# EAGLE board ESP Thermometer (EAGLE 9.6.2)
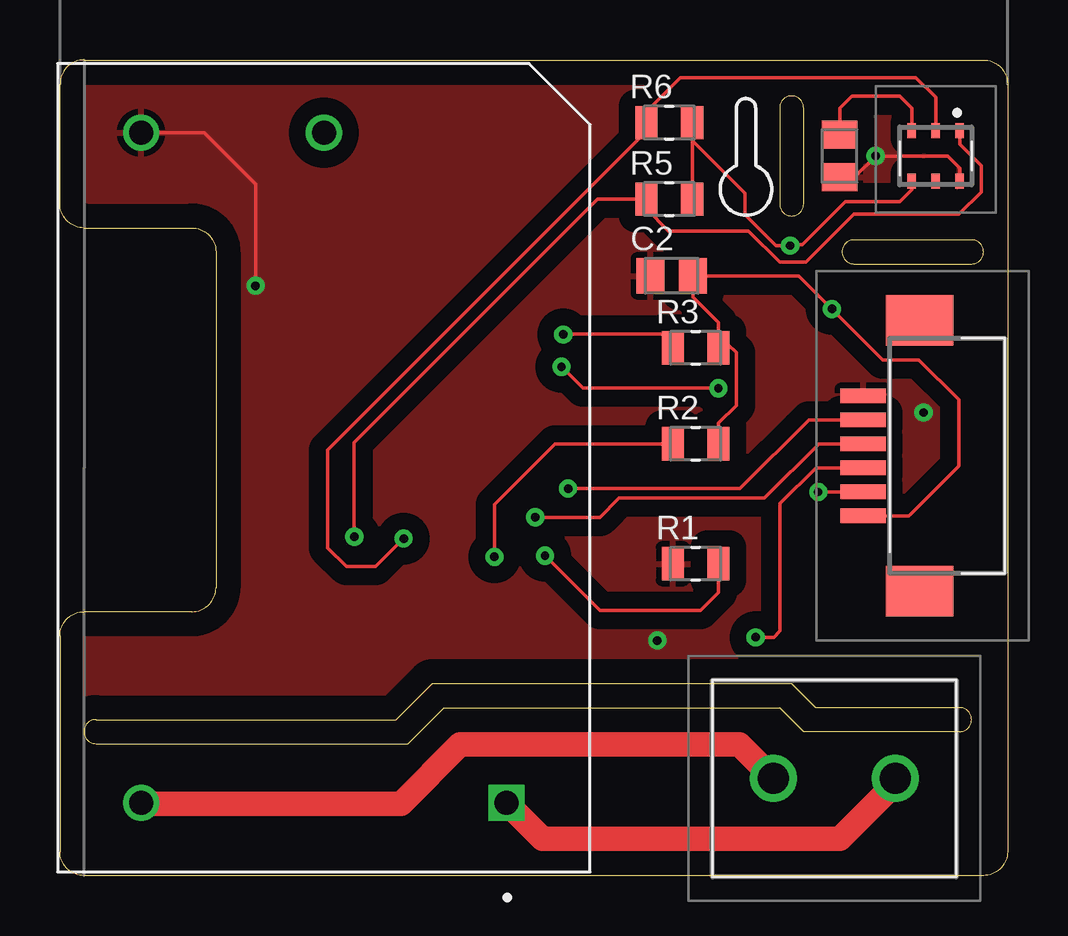
[diagram p0: board, top side]
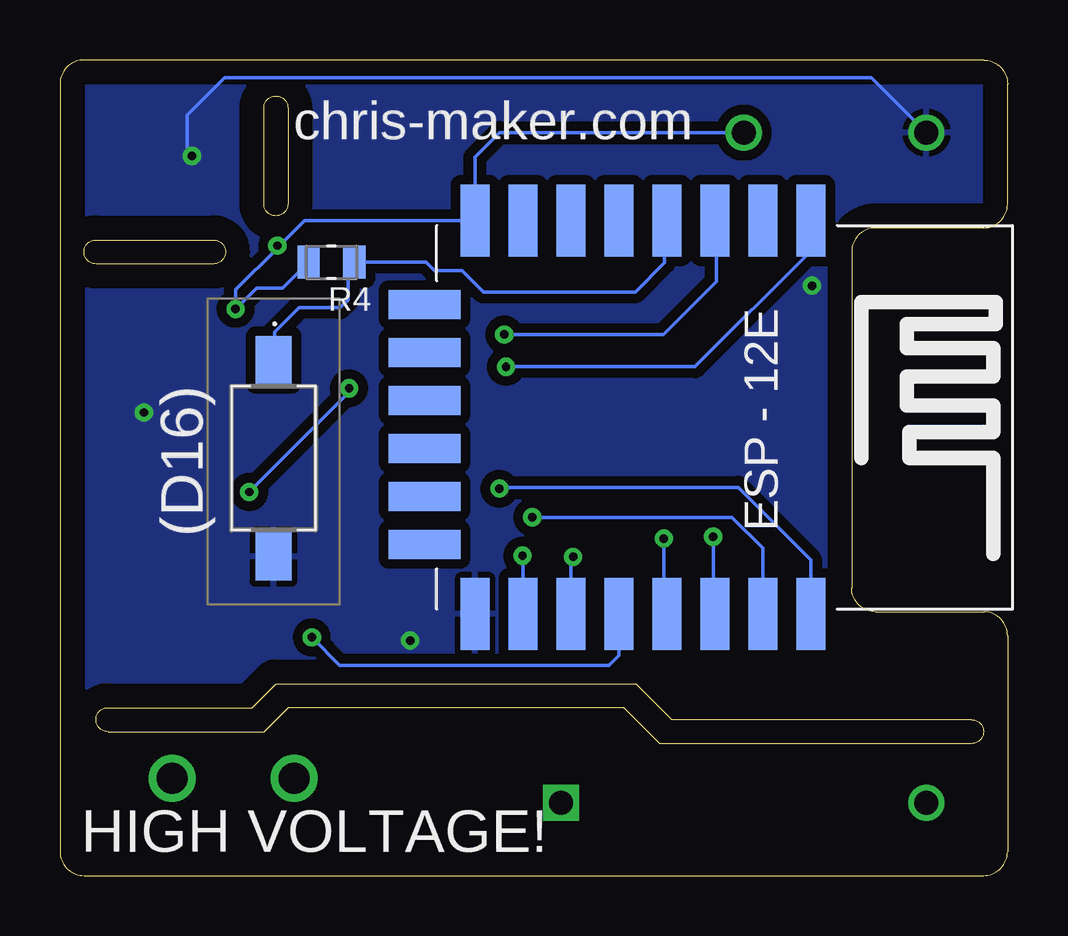
[diagram p1: board, bottom side, seen from below]

Size 39.5 x 34 mm. Coordinates in mm from the lower left corner, seen from the top.
Outline: 1,34 38.5,34 arc-90 39.5,33 39.5,1 arc-90 38.5,0 1,0 arc-90 0,1 0,10 arc-90 1,11 5.5,11 arc90 6.5,12 6.5,26 arc90 5.5,27 1,27 arc-90 0,28 0,33 arc-90 1,34
Outline: 16,7 30,7 31,6 37.5,6 arc90 38,6.5 arc90 37.5,7 31.5,7 30.5,8 15.5,8 14,6.5 1.5,6.5 arc90 1,6 arc90 1.5,5.5 14.5,5.5 16,7
Outline: 30,28 arc90 30.5,27.5 arc90 31,28 31,32 arc90 30.5,32.5 arc90 30,32 30,28
Outline: 38.5,26 arc90 38,26.5 33.1,26.5 arc90 32.6,26 arc90 33.1,25.5 38,25.5 arc90 38.5,26
Copper layers (1*16): Top 0.035mm / dielectric 1.5mm / Bottom 0.035mm
Design rules "untitled": minimum track width 6mil, minimum drill 0.35mm, track to track 0.205mm, track to pad 0.205mm, pad to pad 0.205mm, via to via 0.205mm, smd to smd 6mil, copper to edge 40mil, drill to drill 6mil, minimum pad ring 10mil, minimum via ring 8mil, stop-mask expansion 4mil, vias tented up to drill 0mil, thermal gap 10mil

## Footprints (pad centres in the part's own frame; a part is rotated, then mirrored left to right if it is on the bottom)
CAPC2012X94N = smd 1.16 x 1.47: 1 -0.88,0; 2 0.88,0
HS3004 = smd 0.35 x 0.61: 1 1,1.05; 2 0,1.05; 3 -1,1.05; 4 -1,-1.05; 5 0,-1.05; 6 1,-1.05
TB00650802BE = drill 1.3 pad 1.95: 1 0,0; 2 5.08,0
528520670 = smd 0.6 x 1.9: 1 -2.5,2.475; 2 -1.5,2.475; 3 -0.5,2.475; 4 0.5,2.475; 5 1.5,2.475; 6 2.5,2.475 | smd 2.1 x 2.8: 7 -5.65,0.125; 8 5.65,0.125
CONV_RAC02-3.3SGB = drill 1 pad 1.5 square: 1 -13.97,-7.62 | drill 1 pad 1.5: 2 -13.97,7.62; 3 13.97,7.62; 4 13.97,0
RESC2012X60N = smd 0.92 x 1.38: 1 -0.955,0; 2 0.955,0
PTS636SP50SMTRLFS = smd 2 x 1.5: 1 -4.1,0; 2 4.1,0
ESP12E-SMD = smd 3 x 1.2: ADC -8.3,3.8; CH_PD -8.3,1.8; GND 8.1,-8.2; GPIO0 8.1,-2.2; GPIO2 8.1,-4.2; GPIO4 8.1,-0.2; GPIO5 8.1,1.8; GPIO12 -8.3,-4.2; GPIO13 -8.3,-6.2; GPIO14 -8.3,-2.2; GPIO15 8.1,-6.2; GPIO16 -8.3,-0.2; RESET -8.3,5.8; RXD0 8.1,3.8; TXD0 8.1,5.8; VCC -8.3,-8.2 | smd 1.2 x 3: CS0 -4.8,-10.3; GPIO9 -0.8,-10.3; GPIO10 1.2,-10.3; MISO -2.8,-10.3; MOSI 3.2,-10.3; SCLK 5.2,-10.3

## Placement (x,y rotation side)
C1  0.1uF  [CAPC2012X94N]  32.5,30 270 top
C2  0.1uF  [CAPC2012X94N]  25.5,25 0 top
IC1  HS3003  [HS3004]  36.5,30 0 top
J1  TB006-508-02BE  [TB00650802BE]  29.74,4.05 0 top
J2  52852-0670  [528520670]  35.96,17.5 90 top
PS1  RAC02-3.3SGB  [CONV_RAC02-3.3SGB]  11,17 90 top
R1  10K  [RESC2012X60N]  26.5,13 0 top
R2  1OK  [RESC2012X60N]  26.5,18 0 top
R3  4.7K  [RESC2012X60N]  26.5,22 0 top
R4  10K  [RESC2012X60N]  28.18,25.57 180 bottom
R5  2.2K  [RESC2012X60N]  25.4,28.2 0 top
R6  2.2K  [RESC2012X60N]  25.4,31.39 0 top
S1  PTS636_SP50_SMTR_LFS  [PTS636SP50SMTRLFS]  30.6,17.4 270 bottom
U1  [ESP12E-SMD]  14,19 270 bottom

## Library data of the parts
C1 C2 = 0805YC103J4T2A; AVAILABILITY: In Stock; DESCRIPTION: 10000 pF ±5% 16V Ceramic Capacitor X7R 0805 (2012 Metric); MF: AVX; MP: 0805YC103J4T2A; PACKAGE: 2012 AVX; PRICE: None; PURCHASE-URL: https://pricing.snapeda.com/search/part/0805YC103J4T2A/?ref=eda
IC1 = HS3003; DESCRIPTION: The HS3003 is a highly-accurate, fully-calibrated relative humidity and temperature sensor. The high accuracy, fast measurement response time, and long-term stability, along with the small package size, makes the HS3003 ideal for a wide number of applications from portable to harsh environments.An integrated calibration and temperature compensation logic provides fully corrected RH and T values via a standard ICoutput. The measured data is internally corrected and compensated for accurate operation over a; HEIGHT: 0.9mm; MANUFACTURER_NAME: Renesas Electronics; MANUFACTURER_PART_NUMBER: HS3003; MOUSER_PART_NUMBER: 972-HS3003; MOUSER_PRICE-STOCK: https://www.mouser.co.uk/ProductDetail/Renesas-Electronics/HS3003?qs=1mbolxNpo8dE0wHdd8IyGw%3D%3D
J1 = TB006-508-02BE; DESCRIPTION: Fixed Terminal Blocks screw type, 5.08 , horizontal, 2 poles, CUI Blue, slotted screw, PCB mount; HEIGHT: 10.4mm; MANUFACTURER_NAME: CUI Inc.; MANUFACTURER_PART_NUMBER: TB006-508-02BE; MOUSER_PART_NUMBER: 490-TB006-508-02BE; MOUSER_PRICE-STOCK: https://www.mouser.co.uk/ProductDetail/CUI-Devices/TB006-508-02BE?qs=vLWxofP3U2wEdOVV%2FaT04w%3D%3D
J2 = 52852-0670; DESCRIPTION: FFC & FPC Connectors 1.0 FFC Non ZIF SMT HsgAssy6CktEmbsTpPkg; HEIGHT: 3mm; MANUFACTURER_NAME: Molex; MANUFACTURER_PART_NUMBER: 52852-0670; MOUSER_PART_NUMBER: 538-52852-0670; MOUSER_PRICE-STOCK: https://www.mouser.co.uk/ProductDetail/Molex/52852-0670?qs=%252BdbFUiYBkDZQc5IPgvIwgQ%3D%3D
PS1 = RAC02-3.3SGB; DESCRIPTION: 2W AC/DC-Converter 'POWERLINE' 3kV reg; MF: Recom Power; MP: RAC02-3.3SGB; PACKAGE: DIP-4 Recom Power; PRICE: None
R1-R6 = RC0805FR-07330RL; AVAILABILITY: In Stock; DESCRIPTION: 330 Ohms ±1% 0.125W, 1/8W Chip Resistor 0805 (2012 Metric) Moisture Resistant Thick Film; MF: Yageo; MP: RC0805FR-07330RL; PACKAGE: 2012 Rohm Semiconductor; PRICE: None; PURCHASE-URL: https://pricing.snapeda.com/search/part/RC0805FR-07330RL/?ref=eda
S1 = PTS636_SP50_SMTR_LFS; DESCRIPTION: Tactile Switches Tact 50mA 12VDC, 6.0x3.5, 5.0mm H, 320gf, G leads, No ground pin, Black Actuator; HEIGHT: 5.2mm; MANUFACTURER_NAME: C & K COMPONENTS; MANUFACTURER_PART_NUMBER: PTS636 SP50 SMTR LFS; MOUSER_PART_NUMBER: 611-PTS636SP50SMTRLF; MOUSER_PRICE-STOCK: https://www.mouser.co.uk/ProductDetail/CK/PTS636-SP50-SMTR-LFS/?qs=vLWxofP3U2yQrwr1QnrRJw%3D%3D
U1 = esp8266modules

## Nets
CH_PD: R3.1 U1.CH_PD
GND: C1.2 C2.1 IC1.6 J2.6 PS1.3 R1.1 S1.2 U1.GND
GPIO0: J2.3 U1.GPIO0
GPIO2: R2.1 U1.GPIO2
GPIO15: R1.2 U1.GPIO15
GPIO16: R4.1 S1.1 U1.GPIO16
N$1: J1.2 PS1.1
N$2: J1.1 PS1.2
N$3: C1.1 IC1.3
RESET: J2.2 U1.RESET
RX: J2.5 U1.TXD0
SCK: IC1.1 R5.1 U1.GPIO5
SDA: IC1.2 R6.1 U1.GPIO4
TX: J2.4 U1.RXD0
VCC: C2.2 IC1.4 J2.1 PS1.4 R2.2 R3.2 R4.2 R5.2 R6.2 U1.VCC

## Tracks (layer width: path | path; a pad name or v marks a point on that pad's centre or on a via)
CH_PD  (via drill 0.35)
  Top 0.152: R3.1 25.45,22.58 21.01,22.58 v20.98,22.55
  Bottom 0.152: v20.98,22.55 14.35,22.55 12.14,24.77 12.14,27.24 U1.CH_PD
GND  (via drill 0.35)
  Top 0.152: PS1.3 6.01,30.97 8.15,28.83 v8.15,24.59 | C1.2 33.12,29.12 v34,30 37,30 37.5,29.5 IC1.6
  Bottom 0.152: PS1.3 5.67,33.26 32.64,33.26 34.2,31.7 34.2,30.2 v34,30
  other vias: 24.9,9.8 36,19.3
  pour Top (isolate 0.7): -1,35 41.5,35 41.5,-1 -1,-1
  pour Bottom (isolate 0.406): -1.72,36 42.2,36 42.2,-2 -1.72,-2
GPIO0  (via drill 0.35)
  Top 0.152: J2.3 31.51,17 30.02,15.51 30.02,10.19 29.76,9.93 v29,9.93
  Bottom 0.152: v29,9.93 27.84,8.77 16.62,8.77 16.2,9.19 U1.GPIO0
GPIO2  (via drill 0.35)
  Top 0.152: v18.11,13.28 18.11,15.46 20.64,18 R2.1
  Bottom 0.152: U1.GPIO2 18.2,13.19 v18.11,13.28
GPIO15  (via drill 0.35)
  Top 0.152: R1.2 27.45,11.8 26.7,11.04 22.51,11.04 v20.22,13.34
  Bottom 0.152: U1.GPIO15 20.2,13.32 v20.22,13.34
GPIO16
  Bottom 0.152: U1.GPIO16 14.3,27.2 14.3,25.55 15.52,24.33 21.84,24.33 22.73,25.22 23.88,25.22 24.23,25.58 27.22,25.58 R4.1 27.5,25.3 27.5,24 27.83,23.67 29.54,23.67 30.56,22.66 30.56,21.54 S1.1
N$1
  Top 1.016: PS1.1 20.12,1.53 32.5,1.53 34.82,3.85 J1.2
N$2
  Top 1.016: PS1.2 3.41,3 14.21,3 16.68,5.47 28.32,5.47 J1.1
N$3
  Top 0.152: IC1.3 35.5,32 35,32.5 33,32.5 32.5,32 C1.1
RESET  (via drill 0.35)
  Top 0.152: v27.45,20.32 21.8,20.32 v20.9,21.21 | v31.61,15.99 v31.62,16 J2.2
  Bottom 0.152: U1.RESET 8.2,26.03 13.02,21.21 v20.9,21.21 | v31.61,15.99 27.45,20.15 v27.45,20.32
RX  (via drill 0.35)
  Top 0.152: v21.18,16.13 28.34,16.13 31.21,19 J2.5
  Bottom 0.152: U1.TXD0 8.2,13.15 11.23,16.18 21.13,16.18 v21.18,16.13
SCK  (via drill 0.35)
  Top 0.152: v12.27,14.12 12.27,18.05 22.41,28.2 R5.1 24.45,27.8 25.37,26.87 28.7,26.87 30,25.58 31.1,25.58 33.1,27.57 37.48,27.57 38.4,28.5 38.4,29.6 37.5,30.5 IC1.1
  Bottom 0.152: v12.27,14.12 12.27,10.97 U1.GPIO5
SDA  (via drill 0.35)
  Top 0.152: v14.33,14.05 13.16,12.88 11.94,12.88 11.15,13.66 11.15,17.73 24.45,31.02 R6.1 24.45,31.85 25.86,33.26 35.68,33.26 36.5,32.44 IC1.2
  Bottom 0.152: v14.33,14.05 14.33,11.03 U1.GPIO4
TX  (via drill 0.35)
  Top 0.152: v19.81,14.94 22.51,14.94 23.31,15.73 29.36,15.73 31.63,18 J2.4
  Bottom 0.152: U1.RXD0 10.2,13.65 11.48,14.94 v19.81,14.94
VCC  (via drill 0.35)
  Top 0.152: R2.2 27.45,18.86 28.2,19.6 28.2,21.8 27.83,22.16 R3.2 27.45,23.05 26.38,24.12 C2.2 30.8,25 v32.18,23.62 34.3,21.5 35.81,21.5 37.46,19.85 37.46,17.07 35.39,15 J2.1 | IC1.4 35.5,28.6 35,28.1 32.74,28.1 30.95,26.3 30.48,26.3 v30.44,26.26 29.84,26.26 28.55,27.55 28.55,28.45 26.36,30.64 R6.2 R5.2
  Bottom 0.152: PS1.4 21.18,30.97 22.2,29.95 U1.VCC 29.3,27.3 30.34,26.26 v30.44,26.26 30.44,26.16 32.18,24.42 v32.18,23.62 31.31,24.49 30.22,24.49 R4.2

## Text on the board
bPlace: chris-maker.com | (D16) | HIGH VOLTAGE!